# EAGLE board PDB2 (EAGLE 9.3.0)
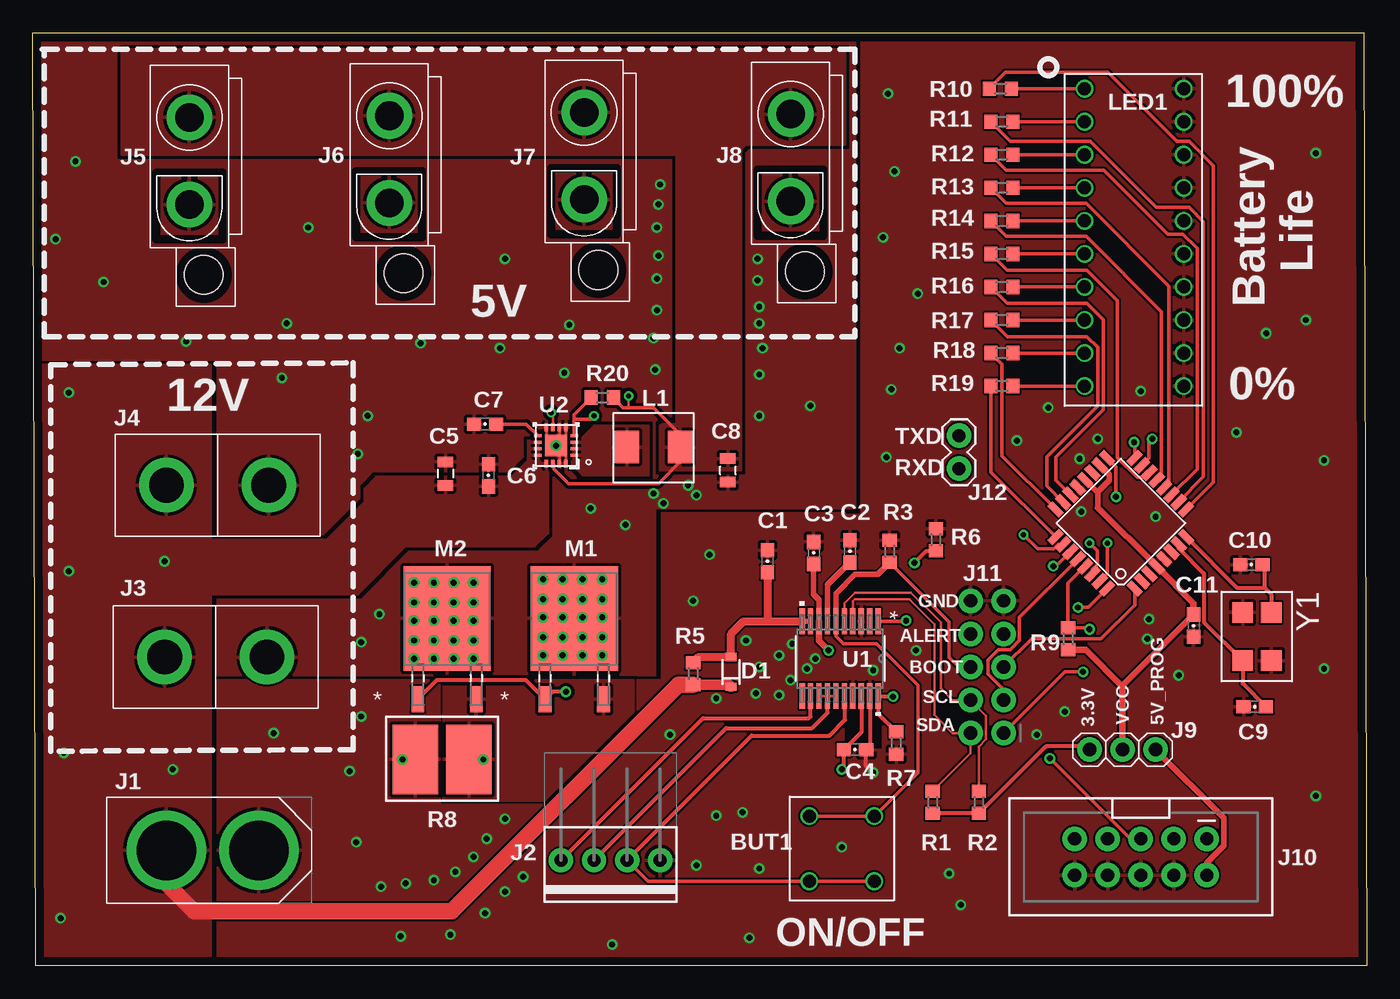
[diagram p0: board, top side]
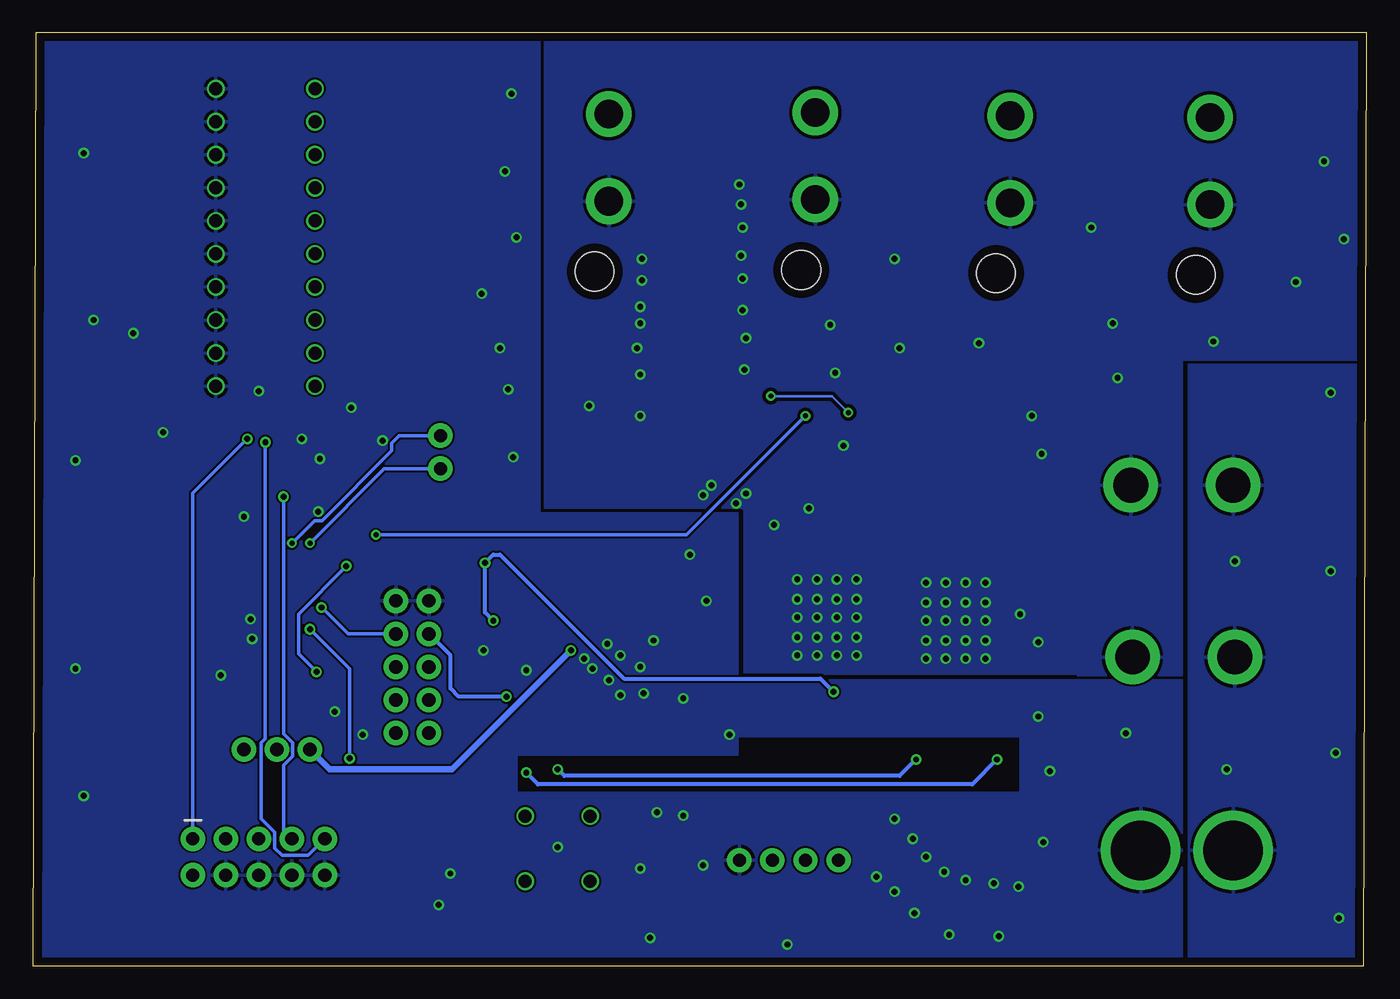
[diagram p1: board, bottom side, seen from below]

Size 102.62 x 71.75 mm. Coordinates in mm from the lower left corner, seen from the top.
Outline: 0.25,0 0,71.75 102.36,71.75 102.62,0 0.25,0
Copper layers (1*16): Top 2mil / dielectric 9mil / Bottom 2mil
Design rules "pie": minimum track width 6mil, minimum drill 15mil, track to track 6mil, track to pad 6mil, pad to pad 6mil, via to via 6mil, smd to smd 6mil, copper to edge 25mil, drill to drill 7mil, minimum pad ring 7mil, minimum via ring 7mil, stop-mask expansion 3mil, vias tented up to drill 21mil, thermal gap 10mil

## Footprints (pad centres in the part's own frame; a part is rotated, then mirrored left to right if it is on the bottom)
D6C_BUTTON = drill 1: U1.1 -2.5,-2.5; U1.2 2.5,-2.5; U2.1 -2.5,2.5; U2.2 2.5,2.5
0603-CAP = smd 1.1 x 1: 1 -0.85,0; 2 0.85,0
0805 = smd 0.8 x 1.2: 1 -0.9,0; 2 0.9,0
SOD-323 = smd 0.63 x 0.83: 1 -1.15,0; 2 1.15,0
XT60CONNECTOR = drill 4.572 pad 6.096: 12V -3.556,0; GND 3.556,0
1X04-MTA = drill 1.016 pad 1.88: 1 -3.81,0; 2 -1.27,0; 3 1.27,0; 4 3.81,0
ANDERSON_VERTICAL = drill 2.667 pad 4.191: PIN1 0,-3.937; PIN2 0,3.937
ATX = drill 2.2 pad 3.5: P$1 -3,0; P$2 3.7,0 | hole 3: 9.1,1.1
1X03 = drill 1.016 pad 1.88: 1 -2.54,0; 2 0,0; 3 2.54,0
2X5-SHROUDED_LOCK = drill 1.016 pad 1.88: 1 -1.397,5.08; 2 1.397,5.08; 3 -1.397,2.54; 4 1.397,2.54; 5 -1.397,0; 6 1.397,0; 7 -1.397,-2.54; 8 1.397,-2.54; 9 -1.397,-5.08; 10 1.397,-5.08
2X5_NOSILK = drill 1.016 pad 1.88: 1 0,0; 2 0,2.54; 3 2.54,0; 4 2.54,2.54; 5 5.08,0; 6 5.08,2.54; 7 7.62,0; 8 7.62,2.54; 9 10.16,0; 10 10.16,2.54
1X02 = drill 1.016 pad 1.88: 1 0,0; 2 2.54,0
ASPI = smd 1.895 x 2.5: P$1 -2.047,0; P$2 2.047,0
BAR_SEGMENT_DISPLAY = drill 1: BAR_DISPLAY0 -3.429,9.652; BAR_DISPLAY1 -3.429,7.112; BAR_DISPLAY2 -3.429,4.572; BAR_DISPLAY3 -3.429,2.032; BAR_DISPLAY4 -3.429,-0.508; BAR_DISPLAY5 -3.429,-3.048; BAR_DISPLAY6 -3.429,-5.588; BAR_DISPLAY7 -3.429,-8.128; BAR_DISPLAY8 -3.429,-10.668; BAR_DISPLAY9 -3.429,-13.208; BAR_DISPLAY10 4.191,-13.208; BAR_DISPLAY11 4.191,-10.668; BAR_DISPLAY12 4.191,-8.128; BAR_DISPLAY13 4.191,-5.588; BAR_DISPLAY14 4.191,-3.048; BAR_DISPLAY15 4.191,-0.508; BAR_DISPLAY16 4.191,2.032; BAR_DISPLAY17 4.191,4.572; BAR_DISPLAY18 4.191,7.112; BAR_DISPLAY19 4.191,9.652
DPAK-M = smd 0.991 x 2.007: 1 -2.25,-6.16; 2 2.25,-6.16 | smd 6.706 x 8.026: 3 0,0.051
R0603 = smd 1 x 1.1: 1 -0.85,0; 2 0.85,0
SMD_SHUNT = smd 3.505 x 5.334: P$1 -2.057,0; P$2 2.057,0
PW20-M = smd 1.981 x 0.406: 1 -2.87,2.925; 2 -2.87,2.275; 3 -2.87,1.625; 4 -2.87,0.975; 5 -2.87,0.325; 6 -2.87,-0.325; 7 -2.87,-0.975; 8 -2.87,-1.625; 9 -2.87,-2.275; 10 -2.87,-2.925; 11 2.87,-2.925; 12 2.87,-2.275; 13 2.87,-1.625; 14 2.87,-0.975; 15 2.87,-0.325; 16 2.87,0.325; 17 2.87,0.975; 18 2.87,1.625; 19 2.87,2.275; 20 2.87,2.925
RGT0016C = smd 0.6 x 0.24: 1 -1.4,0.75; 2 -1.4,0.25; 3 -1.4,-0.25; 4 -1.4,-0.75; 9 1.4,-0.75; 10 1.4,-0.25; 11 1.4,0.25; 12 1.4,0.75 | smd 0.24 x 0.6: 5 -0.75,-1.4; 6 -0.25,-1.4; 7 0.25,-1.4; 8 0.75,-1.4; 13 0.75,1.4; 14 0.25,1.4; 15 -0.25,1.4; 16 -0.75,1.4 | smd 1.68 x 1.68: 17 0,0
TQFP32-08 = smd 1.27 x 0.559: 1 -4.293,2.8; 2 -4.293,2; 3 -4.293,1.2; 4 -4.293,0.4; 5 -4.293,-0.4; 6 -4.293,-1.2; 7 -4.293,-2; 8 -4.293,-2.8; 17 4.293,-2.8; 18 4.293,-2; 19 4.293,-1.2; 20 4.293,-0.4; 21 4.293,0.4; 22 4.293,1.2; 23 4.293,2; 24 4.293,2.8 | smd 0.559 x 1.27: 9 -2.8,-4.293; 10 -2,-4.293; 11 -1.2,-4.293; 12 -0.4,-4.293; 13 0.4,-4.293; 14 1.2,-4.293; 15 2,-4.293; 16 2.8,-4.293; 25 2.8,4.293; 26 2,4.293; 27 1.2,4.293; 28 0.4,4.293; 29 -0.4,4.293; 30 -1.2,4.293; 31 -2,4.293; 32 -2.8,4.293
SMD_CRYSTAL = smd 1.6 x 1.6: P0 -1.905,1.27; P1 -1.905,-0.93; P2 1.795,-0.93; P3 1.795,1.27

## Placement (x,y rotation side)
BUT1  D6C90F1LFS  [D6C_BUTTON]  62.23,9.02 0 top
C1  2.2uF  [0603-CAP]  56.52,31.11 270 top
C2  1uF  [0603-CAP]  62.87,31.88 270 top
C3  2.2uF  [0603-CAP]  60.07,31.75 270 top
C4  .1uF  [0603-CAP]  63.25,16.64 0 top
C5  10uF  [0805]  31.75,37.85 270 top
C6  .1uF  [0603-CAP]  35.05,37.72 270 top
C7  1000pF  [0603-CAP]  34.8,41.66 0 top
C8  22uF  [0805]  53.47,38.1 90 top
C9  18pF  [0603-CAP]  93.98,19.94 180 top
C10  18pF  [0603-CAP]  93.73,30.86 180 top
C11  1uF  [0603-CAP]  89.28,26.16 270 top
D1  220mV  [SOD-323]  53.72,22.61 90 top
J1  XT60CONNECTOR  [XT60CONNECTOR]  13.84,8.89 0 top
J2  [1X04-MTA]  44.45,8.13 180 top
J3  ANDERSONVERTICAL  [ANDERSON_VERTICAL]  14.1,23.75 270 top
J4  ANDERSONVERTICAL  [ANDERSON_VERTICAL]  14.22,36.96 90 top
J5  ATX  [ATX]  58.29,62.48 270 top
J6  ATX  [ATX]  12.07,62.23 270 top
J7  ATX  [ATX]  42.42,62.61 270 top
J8  ATX  [ATX]  27.43,62.36 270 top
J9  [1X03]  83.82,16.64 180 top
J10  AVR_SPI_PROG_5X2LOCK  [2X5-SHROUDED_LOCK]  85.22,8.38 270 top
J11  [2X5_NOSILK]  74.68,17.91 90 top
J12  [1X02]  71.25,38.23 90 top
L1  2.2uH  [ASPI]  47.75,39.88 0 top
LED1  BAR_SEGMENT_DISPLAY  [BAR_SEGMENT_DISPLAY]  84.33,57.79 0 top
M1  STD20NF06LDPAK-M  [DPAK-M]  41.66,26.67 0 top
M2  STD20NF06LDPAK-M  [DPAK-M]  31.88,26.67 0 top
R1  3.3k  [R0603]  69.21,12.57 270 top
R2  3.3k  [R0603]  72.77,12.57 270 top
R3  10k  [R0603]  65.91,31.88 270 top
R5  10k  [R0603]  50.8,22.48 270 top
R6  5.6k  [R0603]  69.47,32.77 270 top
R7  499k  [R0603]  66.42,17.14 270 top
R8  5m  [SMD_SHUNT]  31.5,15.88 0 top
R9  10k  [R0603]  79.63,25.15 270 top
R10  220  [R0603]  74.42,67.44 0 top
R11  220  [R0603]  74.55,64.9 0 top
R12  220  [R0603]  74.55,62.36 0 top
R13  220  [R0603]  74.55,59.82 0 top
R14  220  [R0603]  74.55,57.28 0 top
R15  220  [R0603]  74.55,54.74 0 top
R16  220  [R0603]  74.55,52.2 0 top
R17  220  [R0603]  74.55,49.66 0 top
R18  220  [R0603]  74.55,47.12 0 top
R19  220  [R0603]  74.55,44.58 0 top
R20  100k  [R0603]  43.82,43.69 0 top
U1  BQ7692006PWRPW20-M  [PW20-M]  62.1,23.62 270 top
U2  Value  [RGT0016C]  40.26,40.01 180 top
U3  [TQFP32-08]  83.69,34.04 135 top
Y1  [SMD_CRYSTAL]  93.98,25.27 270 top

## Library data of the parts
BUT1 J5-J8 L1 LED1 U3 = pie
C1-C11 = pie; PIE-INT-REF-NUM: CAPACITOR-GENERIC
D1 = pie; PIE-INT-REF-NUM: DIODE
J1 = pie; PARTNUMBER: PRT-10474
J2 = pie; PIE-INT-REF-NUM: MTA
J3 J4 = pie; PIE-INT-REF-NUM: Anderson
J9 = pie; PIE-INT-REF-NUM: BULK-STOCK
J10 = SparkFun-Connectors; PROD_ID: CONN-08671; SF_ID: PRT-08506
J11 J12 = SparkFun-Connectors
M1 M2 = pie; MANUFACTURER_PART_NUMBER: STD20NF06L; VENDOR: STMicroelectronics
R1-R3 R5-R7 R9-R20 = pie; DESCRIPTION: RESISTOR, American symbol; DISTRIBUTOR: DigiKey; MANUFACTURER: Rohm Semiconductor; NOTES: Cut Tape; PACKAGE: R0603
R8 = pie; MANUFACTURER_PART_NO: WSHM28185L000FEA
U1 = pie; MANUFACTURER_PART_NUMBER: BQ7692006PWR; VENDOR: Texas Instruments
U2 = pie; MANUFACTURER: Texas Instruments; MANUFACTURER_NAME: Texas Instruments; MANUFACTURER_PART_NUMBER: TPS62133RGTR; PARTNUMBER: TPS62133RGTR; REFDES: RefDes; TYPE: TYPE
Y1 = pie; MANUFACTURER_PART_NO: ECS-80-18-30B-AGN-TR

## Nets
3.3V: C3.2 J9.3 R1.2 R2.2 U1.8
5V: C8.2 J5.P$1 J6.P$1 J7.P$1 J8.P$1 L1.P$2 R20.2 U2.7 U2.14
5V_PROG: J9.1 J10.2
12V: C5.2 C6.2 D1.1 J1.12V J3.PIN1 J4.PIN2 R5.2 U2.10 U2.11 U2.12 U2.13
ALERT: J11.8 R7.1 U1.20
BCELL1: BUT1.U1.1 BUT1.U1.2 J2.2 U1.16
BCELL2: J2.3 U1.13 U1.14 U1.15
BCELL3: J2.4 U1.12
BOOT: BUT1.U2.1 BUT1.U2.2 J11.6 R3.2 U1.6
BOOT_IN: J11.5 U3.1
CAP1: C2.2 U1.7
DSG: M1.1 M2.1 R6.2 U1.1
GND: C1.1 C2.1 C3.1 C4.2 C9.2 C10.2 C11.2 J1.GND J2.1 J10.4 J10.6 J10.8 J10.10 J11.9 J11.10 LED1.BAR_DISPLAY10 LED1.BAR_DISPLAY11 LED1.BAR_DISPLAY12 LED1.BAR_DISPLAY13 LED1.BAR_DISPLAY14 LED1.BAR_DISPLAY15 LED1.BAR_DISPLAY16 LED1.BAR_DISPLAY17 LED1.BAR_DISPLAY18 LED1.BAR_DISPLAY19 R3.1 R6.1 R7.2 R8.P$1 U1.3 U1.17 U1.19 U3.5 U3.21 Y1.P1 Y1.P3
GND_OUT: C5.1 C6.1 C7.1 C8.1 J3.PIN2 J4.PIN1 J5.P$2 J6.P$2 J7.P$2 J8.P$2 M1.3 M2.3 U2.5 U2.6 U2.8 U2.15 U2.16 U2.17
LED1: R10.1 U3.9
LED2: R11.1 U3.10
LED3: R12.1 U3.11
LED4: R13.1 U3.12
LED5: R14.1 U3.13
LED6: R15.1 U3.14
LED7: R16.1 U3.22
LED8: R17.1 U3.23
LED9: R18.1 U3.24
LED10: R19.1 U3.25
MISO: J10.9 U3.16
MOSI: J10.1 U3.15
N$2: J11.1 U3.27
N$4: L1.P$1 U2.1 U2.2 U2.3
N$5: C9.1 U3.7 Y1.P2
N$6: C7.2 U2.9
N$7: C10.1 U3.8 Y1.P0
N$8: J11.3 U3.28
N$11: J11.7 U3.32
N$12: LED1.BAR_DISPLAY0 R10.2
N$13: LED1.BAR_DISPLAY1 R11.2
N$14: LED1.BAR_DISPLAY2 R12.2
N$15: LED1.BAR_DISPLAY3 R13.2
N$16: LED1.BAR_DISPLAY4 R14.2
N$17: LED1.BAR_DISPLAY5 R15.2
N$18: LED1.BAR_DISPLAY6 R16.2
N$19: LED1.BAR_DISPLAY7 R17.2
N$20: LED1.BAR_DISPLAY8 R18.2
N$21: LED1.BAR_DISPLAY9 R19.2
PG: R20.1 U2.4 U3.26
RST: J10.5 R9.1 U3.29
RXD: J12.1 U3.30
SCK: J10.7 U3.17
SCL: J11.4 R2.1 U1.5
SDA: J11.2 R1.1 U1.4
SRP: C4.1 M1.2 M2.2 R8.P$2 U1.18
TXD: J12.2 U3.31
VCC: C11.1 J9.2 R9.2 U3.4 U3.18 U3.20
VIN: C1.2 D1.2 R5.1 U1.9 U1.10

## Tracks (layer width: path | path; a pad name or v marks a point on that pad's centre or on a via)
3.3V  (via drill 0.46)
  Top 0.305: R1.2 R2.2 77.94,16.89 81.03,16.89 J9.3
  Top 0.406: C3.2 60.07,28.57 60.48,28.17 U1.8
  Top 0.508: U1.8 60.48,24.99 v61.21,24.26
  Bottom 0.508: v61.21,24.26 70.36,15.11 79.76,15.11 J9.3
5V  (via drill 0.38)
  Top 0.203: U2.7 40.01,42.41 v39.88,42.55 | v45.85,43.82 45.85,43.05 45.97,42.93
  Top 0.254: R20.2 45.43,42.93 45.97,42.93 47.75,42.93 49.8,40.88 L1.P$2 49.8,38.75 48.13,37.08 41.22,37.08 40.11,38.19 40.11,38.5 U2.14
  Bottom 0.203: v39.88,42.55 41.15,43.82 v45.85,43.82
  pour Top (isolate 0.254): 48.26,41.53 48.26,38.1 54.48,38.1 54.48,62.74 54.86,63.12 62.48,63.12 62.48,70.48 6.98,70.48 6.86,70.36 6.86,62.36 49.53,62.36 49.53,41.66 48.39,41.66
5V_PROG
  Top 0.406: J10.2 90.3,7.95 91.59,9.24 91.59,11.41 J9.1
12V  (via drill 0.46)
  Top 0.813: R5.2 53.55,21.63 D1.1
  Top 1.27: J1.12V 10.29,6.35 12.45,4.19 32.22,4.19 49.66,21.63 R5.2
  other vias: 2.16,3.68 2.41,16.38 2.79,30.35 2.79,44.07 10.16,31.11 10.79,15.11
  pour Top (isolate 0.254, rank 2): -2.92,46.23 -2.92,-2.16 13.72,-2.16 13.72,46.23
  pour Bottom (isolate 0.254, rank 2): -3.68,46.23 13.72,46.23 13.72,-2.41 -3.68,-2.41
  pour Top (isolate 0.254): 12.7,32.77 22.61,32.77 25.53,35.69 25.53,36.7 26.42,37.59 36.83,37.59 38.1,38.86 38.1,40.39 39.12,40.39 39.12,38.86 39.62,38.86 39.62,33.27 38.61,32.26 28.7,32.26 25.02,28.57 12.57,28.57 12.57,32.64
ALERT  (via drill 0.46)
  Top 0.305: R7.1 65.03,19.39 U1.20 66.12,20.75 v66.17,20.7
  Bottom 0.305: v66.17,20.7 69.85,20.7 70.48,21.34 70.48,23.88 J11.8
BCELL1
  Top 0.254: BUT1.U1.2 BUT1.U1.1 47.33,6.52 J2.2
  Top 0.305: J2.2 55.3,17.7 61.27,17.7 62.48,18.92 62.48,20.7 U1.16
BCELL2
  Top 0.203: U1.13 U1.14 U1.15
  Top 0.305: J2.3 53.34,18.29 59.94,18.29 61.13,19.47 U1.14
BCELL3
  Top 0.305: J2.4 51.56,19.05 59.69,19.05 59.83,19.19 U1.12
BOOT
  Top 0.254: R3.2 70.48,26.45 70.48,23.75 71.25,22.99 J11.6 | U1.6 61.78,25.34 62.36,24.77 64.9,24.77 68.07,21.59 68.07,14.86 BUT1.U2.2 BUT1.U2.1
  Top 0.406: U1.6 61.78,28.63 63.25,30.1 65.02,30.1 65.91,30.99 R3.2
BOOT_IN
  Top 0.254: J11.5 76.83,25.15 82.17,25.15 84.75,27.72 U3.1
CAP1
  Top 0.406: C2.2 61.13,29.29 U1.7
DSG  (via drill 0.46)
  Top 0.254: U1.1 67.13,26.49
  Top 0.305: v41.02,21.08 39.98,21.08 M1.1 37.95,21.97 31.09,21.97 M2.1 | 67.13,26.49 v67.18,26.54 | R6.2 68.75,31.92 v67.82,30.99
  Bottom 0.305: v41.02,21.08 42.04,22.1 57.15,22.1 66.67,31.62 67.18,31.62 v67.82,30.99 67.82,27.18 v67.18,26.54
GND  (via drill 0.45, 0.46)
  Top 0.305: v64.64,14.86 64.1,15.41 C4.2 64.38,16.92 U1.19
  Bottom 0.305: v28.45,15.88 30.35,13.97 63.75,13.97 v64.64,14.86
  other vias: 18.54,17.91 25.27,19.18 24.38,14.99 24.89,9.53 36.32,11.3 34.93,9.78 33.91,8.38 32.51,7.24 30.86,6.6 28.7,6.35 26.8,6.1 28.32,2.29 32.13,2.41 34.8,4.06 36.32,5.71 37.72,6.86 49.02,17.78 52.58,11.56 44.58,1.65 55.12,2.16 51.05,7.75 55.88,7.49 54.61,11.81 62.23,9.14 70.48,7.11 71.37,4.7 57.4,23.88 57.4,20.83 67.94,24.26 50.8,28.07 52.07,31.62 79.38,19.56 77.22,17.78 88.14,22.35 85.85,26.67 80.64,34.93 86.36,34.54 85.72,25.15 98.68,13.08 99.31,22.86 99.31,38.86 97.92,49.66 92.58,41.02 94.87,48.64 98.68,62.48 65.79,67.06 66.29,61.09 65.41,56.01 68.07,51.69 66.67,47.5 66.04,44.32 65.66,39.12 75.69,40.39 78.1,42.93 80.52,38.99 81.91,40.51 85.22,44.2 54.86,25.02 55.63,20.95 52.58,20.57 60.2,23.62 59.56,22.86 58.29,21.97 58.42,24.77 55.88,22.99 64.64,22.73
  pour Bottom: 65.4,-3.04 101.98,-3.04 101.98,73.28 63.63,73.28 63.63,34.8 48.39,34.8 48.39,16.26 65.41,16.26 65.41,-3.04
  pour Bottom (rank 2): 14.22,-3.3 66.04,-3.3 66.04,13.34 26.67,13.34 26.67,21.97 14.22,21.97
  pour Top (rank 2): 14.35,-3.68 65.79,-3.68 65.79,16.64 65.66,16.64 62.36,16.64 62.36,20.95 62.48,20.95 62.48,34.8 48.39,34.8 48.39,21.97 14.22,21.97 14.22,-3.68
  pour Top (rank 2): 103.25,-3.68 65.41,-3.68 65.41,21.59 62.1,21.59 62.1,34.67 63.75,34.67 63.75,73.28 103.25,73.28
  pour Bottom (rank 2): 26.42,21.97 26.42,17.65 49.15,17.65 49.15,21.97
GND_OUT  (via drill 0.46)
  Top 0.203: U2.15 40.51,40.01 40.39,40.01 | 40.39,40.01 U2.17 | U2.6 40.51,40.13 40.39,40.01 | U2.5 41.01,40.76 U2.17 | U2.8 39.51,40.76 U2.17 | U2.16 41.01,39.38 40.39,40.01
  other vias: 29.34,29.46 30.86,29.46 32.39,29.46 33.91,29.46 3.3,61.85 1.78,55.88 5.46,52.58 11.81,48.01 19.56,49.4 21.21,56.77 19.18,45.21 25.78,42.29 25.02,39.37 29.34,26.54 30.86,26.54 32.39,26.54 33.91,26.54 40.26,40.01 29.84,47.88 36.32,54.36 35.94,47.5 41.28,49.28 47.75,48.26 40.89,45.59 48.01,50.42 48.01,52.83 48.13,54.61 48.01,56.77 48.13,58.55 48.26,60.07 47.88,45.85 55.88,45.47 56.13,47.5 55.88,49.4 55.88,50.67 55.75,52.71 55.75,54.36 55.88,42.29 59.82,43.05 42.93,35.18 45.59,33.91 26.67,27.05 25.27,24.89 29.34,27.94 30.86,27.94 32.39,27.94 33.91,27.94 29.34,25.02 30.86,25.02 32.39,25.02 33.91,25.02 29.34,23.62 30.86,23.62 32.39,23.62 33.91,23.62 39.24,29.72 40.77,29.72 42.29,29.72 43.82,29.72 39.24,28.19 40.77,28.19 42.29,28.19 43.82,28.19 39.24,26.8 40.77,26.8 42.29,26.8 43.82,26.8 39.24,25.27 40.77,25.27 42.29,25.27 43.82,25.27 39.24,23.88 40.77,23.88 42.29,23.88 43.82,23.88 50.42,36.96 51.05,36.2 48.51,35.56 47.75,36.32
  pour Top (isolate 0.254, rank 2): 14.22,22.35 47.88,22.35 47.88,35.18 63.25,35.18 63.25,71.25 -2.92,71.25 -2.92,46.61 14.22,46.61
  pour Bottom (isolate 0.254, rank 2): 14.22,22.35 22.22,22.35 22.22,22.48 47.88,22.48 47.88,35.18 63.25,35.18 63.25,72.52 -2.92,72.52 -2.92,46.61 14.22,46.61
LED1
  Top 0.254: U3.9 90.8,37.19 90.8,61.53 88.95,63.39 87.99,63.39 82.68,68.71 74.8,68.71 73.57,67.48 R10.1
LED2
  Top 0.254: R11.1 75.21,63.39 81.33,63.39 86.41,58.31 88.95,58.31 90.04,57.21 90.04,37.59 88.14,35.69 U3.10
LED3
  Top 0.254: U3.11 89.55,38.2 89.55,55.16 88.47,56.24 87.31,56.24 82.4,61.16 74.9,61.16 R12.1 | U3.11
LED4
  Top 0.254: U3.12 87.37,37.15 87.37,52.27 81.02,58.62 74.9,58.62 R13.1 | U3.12
LED5
  Top 0.254: U3.13 86.81,37.71 86.81,50.29 81.02,56.08 74.9,56.08 R14.1 | U3.13
LED6
  Top 0.254: U3.14 85.52,37.56 84.95,37.56 83.44,39.07 83.44,51.12 81.09,53.47 74.97,53.47 R15.1 | U3.14
LED7
  Top 0.254: U3.22 78.69,37.35 78.69,39.09 82.34,42.74 82.34,49.68 81.09,50.93 74.97,50.93 R16.1
LED8
  Top 0.254: U3.23 77.99,36.91 77.99,39.13 81.93,43.07 81.93,47.55 81.09,48.39 74.97,48.39 R17.1
LED9
  Top 0.254: U3.24 74.55,39.22 74.55,46.27 R18.1 | U3.24
LED10
  Top 0.254: U3.25 73.7,37.96 R19.1 | U3.25
MISO  (via drill 0.46)
  Top 0.254: U3.16 84.75,40.22 v84.71,40.26
  Bottom 0.254: v84.71,40.26 84.71,17.47 85.04,17.14 85.04,11.33 84,10.28 84,9.07 83.44,8.51 81.41,8.51 J10.9
MOSI  (via drill 0.46)
  Top 0.254: v86.11,40.51 85.85,40.26 85.85,39.02 U3.15
  Bottom 0.254: J10.1 90.3,36.32 v86.11,40.51
N$2  (via drill 0.46)
  Top 0.254: J11.1 79.38,22.61 v80.77,22.61 | v78.49,30.73 78.69,30.73 U3.27
  Bottom 0.254: v80.77,22.61 82.17,24 82.17,27.05 v78.49,30.73
N$4
  pour Top (isolate 0.254): 41.4,40.39 41.4,38.61 42.29,37.72 47.37,37.72 47.37,41.53 43.18,41.53 42.04,40.39
N$5
  Top 0.305: U3.7 88.14,32.11 90.09,30.17 90.09,26.44 Y1.P2 93.05,21.72 C9.1
N$6
  Top 0.254: C7.2 37.96,41.66 U2.9
N$7
  Top 0.305: U3.8 92.61,29.08 94.74,29.08 | 94.74,29.08 95.25,28.57 Y1.P0 | 94.74,29.08 94.74,30.7 C10.1
N$8
  Top 0.254: J11.3 74.68,21.26 73.46,22.48 73.46,23.49 74.27,24.31 75.18,24.31 75.89,25.02 75.89,26.8 U3.28
N$11  (via drill 0.46)
  Top 0.254: U3.32 81.18,27.56 v80.39,27.56
  Bottom 0.254: v80.39,27.56 78.36,25.53 J11.7
N$12
  Top 0.254: LED1.BAR_DISPLAY0 R10.2
N$13
  Top 0.254: LED1.BAR_DISPLAY1 R11.2
N$14
  Top 0.254: LED1.BAR_DISPLAY2 R12.2
N$15
  Top 0.254: LED1.BAR_DISPLAY3 R13.2
N$16
  Top 0.254: LED1.BAR_DISPLAY4 R14.2
N$17
  Top 0.254: LED1.BAR_DISPLAY5 R15.2
N$18
  Top 0.254: LED1.BAR_DISPLAY6 R16.2
N$19
  Top 0.254: LED1.BAR_DISPLAY7 R17.2
N$20
  Top 0.254: LED1.BAR_DISPLAY8 R18.2
N$21
  Top 0.254: LED1.BAR_DISPLAY9 R19.2
PG  (via drill 0.38)
  Top 0.254: R20.1 41.66,42.38 41.66,42.04 | 41.66,42.04 U2.4 | 41.66,42.04 42.93,42.04 v43.18,42.29 | U3.26 78.9,32.41 78.54,32.05 77.29,32.05 v76.2,33.15
  Bottom 0.254: v43.18,42.29 52.32,33.15 v76.2,33.15
RST  (via drill 0.46)
  Top 0.254: U3.29 79.63,29.41 R9.1 81.17,26 v81.28,25.89 | J10.5 84.41,9.78 v78.23,15.95
  Bottom 0.254: v78.23,15.95 78.23,22.84 v81.28,25.89
RXD  (via drill 0.38)
  Top 0.254: U3.30 81.51,30.49 81.87,30.85 81.87,31.93 v81.28,32.51
  Bottom 0.254: v81.28,32.51 75.56,38.23 J12.1
SCK  (via drill 0.46)
  Top 0.254: U3.17 83.31,38.38 v83.31,36.07
  Bottom 0.254: J10.7 83.31,10.41 83.31,15.42 82.6,16.13 82.6,17.14 83.31,17.85 v83.31,36.07
SCL
  Top 0.203: U1.5 62.43,27.88 63.25,28.7 67.56,28.7 69.85,26.42 69.85,21.34 70.74,20.45 J11.4 73.33,19.25 73.33,17.41 72.77,16.85 R2.1
SDA
  Top 0.203: U1.4 63.08,28.03 63.25,28.19 67.44,28.19 69.34,26.29 69.34,19.3 70.74,17.91 J11.2 72.14,16.34 R1.1
SRP  (via drill 0.45)
  Top 0.305: v62.23,15.11 62.4,15.28 C4.1 63.73,17.97 U1.18
  Bottom 0.305: v34.67,15.88 35.94,14.61 61.72,14.61 v62.23,15.11
  pour Top (isolate 0.254): 31.62,21.84 31.62,12.7 40.89,12.7 46.23,18.03 46.23,21.97 31.75,21.97
TXD  (via drill 0.38)
  Top 0.254: U3.31 82.66,30.18 v82.66,32.51
  Bottom 0.254: v82.66,32.51 80.94,34.24 80.36,34.24 75.01,39.59 75.01,40.17 74.41,40.77 J12.2
VCC
  Top 0.406: U3.18 82.8,37.75 82.8,37.34 81.94,36.47 | 81.94,36.47 81.94,35.23 | U3.20 81.82,36.47 81.94,36.47
  Top 0.508: J9.2 83.82,21.46 | 83.82,21.46 83.82,21.55 C11.1 89.28,27.88 U3.4 81.94,35.23 | 83.82,21.46 80.99,24.3 R9.2
VIN
  Top 0.406: U1.10 U1.9
  Top 0.61: R5.1 51.23,23.76 D1.2 53.72,25.53 54.69,26.49 56.52,26.49 | 56.52,26.49 U1.10 | C1.2 56.52,26.49

## Text on the board
tNames: 100% | J6 | J8 | J5 | J7 | Life | Battery | 5V | 12V | L1 | TXD | 0% | RXD | GND | ALERT | BOOT | SCL | SDA | 3.3V | VCC | 5V_PROG | J1 | ON/OFF